# EAGLE board Shield STM32F407VET6 Mini - Backup (EAGLE 9.3.1)
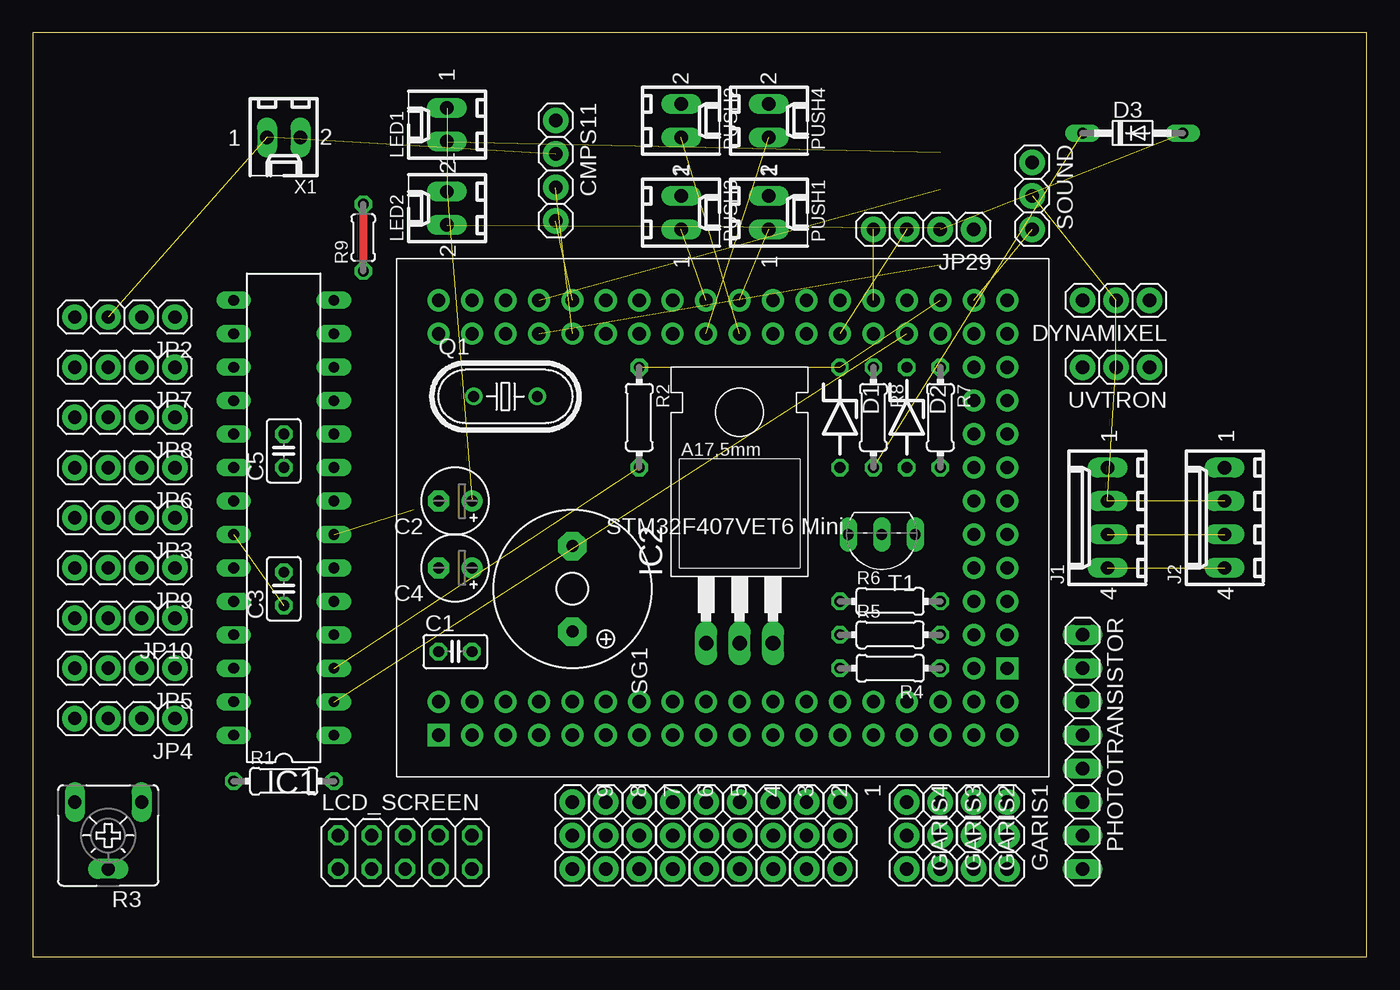
[diagram p0: board, top side]
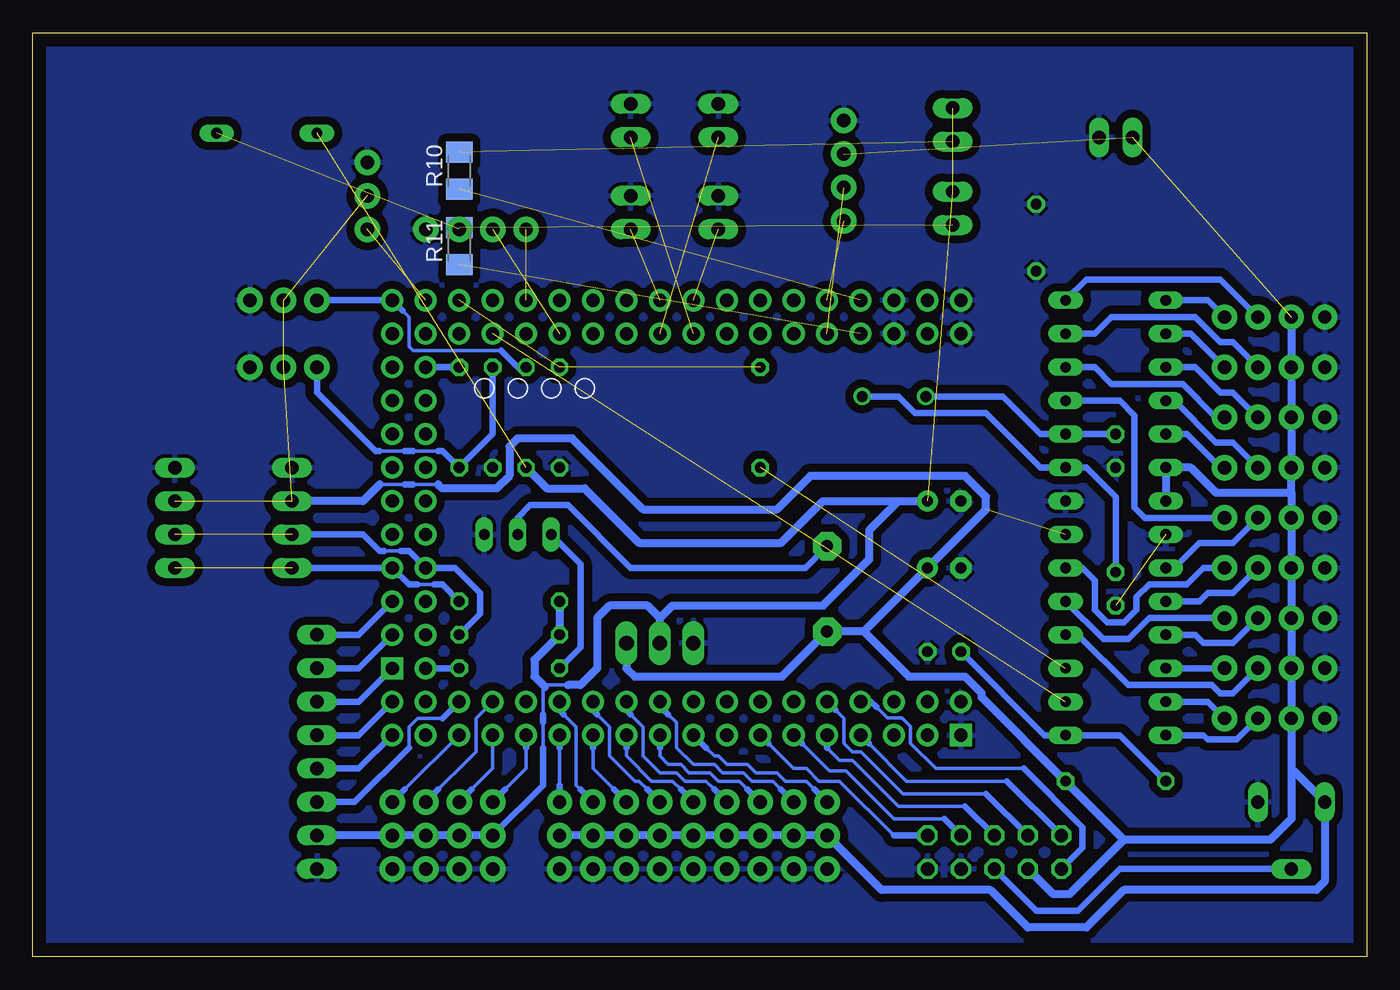
[diagram p1: board, bottom side, seen from below]

Size 101.26 x 70.16 mm. Coordinates in mm from the lower left corner, seen from the top.
Outline: 0,0 101.26,0 101.26,70.16 0,70.16 0,0
Copper layers (1*16): Top 0.035mm / dielectric 1.5mm / Bottom 0.035mm
Design rules "default *": minimum track width 6mil, minimum drill 0.35mm, track to track 6mil, track to pad 6mil, pad to pad 6mil, via to via 6mil, smd to smd 6mil, copper to edge 40mil, drill to drill 6mil, minimum pad ring 10mil, minimum via ring 8mil, stop-mask expansion 4mil, vias tented up to drill 0mil, thermal gap 10mil

## Footprints (pad centres in the part's own frame; a part is rotated, then mirrored left to right if it is on the bottom)
1X03 = drill 1.016 pad 1.93: 1 -2.54,0; 2 0,0; 3 2.54,0
C025-025X050 = drill 0.813 octagon: 1 -1.27,0; 2 1.27,0
E2,5-5 = drill 0.813 pad 1.6: + -1.27,0 | drill 0.813 pad 1.6 octagon: - 1.27,0
1X04 = drill 1.016 pad 1.93: 1 -3.81,0; 2 -1.27,0; 3 1.27,0; 4 3.81,0
ZDIO-7.5 = drill 0.813 octagon: A 3.81,0; C -3.81,0
DO34-7 = drill 0.813 long: A 3.81,0; C -3.81,0
DIL28-3 = drill 0.813 long: 1 -16.51,-3.81; 2 -13.97,-3.81; 3 -11.43,-3.81; 4 -8.89,-3.81; 5 -6.35,-3.81; 6 -3.81,-3.81; 7 -1.27,-3.81; 8 1.27,-3.81; 9 3.81,-3.81; 10 6.35,-3.81; 11 8.89,-3.81; 12 11.43,-3.81; 13 13.97,-3.81; 14 16.51,-3.81; 15 16.51,3.81; 16 13.97,3.81; 17 11.43,3.81; 18 8.89,3.81; 19 6.35,3.81; 20 3.81,3.81; 21 1.27,3.81; 22 -1.27,3.81; 23 -3.81,3.81; 24 -6.35,3.81; 25 -8.89,3.81; 26 -11.43,3.81; 27 -13.97,3.81; 28 -16.51,3.81
TO220 = drill 1.118 long: 1 -2.54,-6.35; 2 0,-6.35; 3 2.54,-6.35
6410-04 = drill 1.016 long: 1 3.81,0; 2 1.27,0; 3 -1.27,0; 4 -3.81,0
2X05 = drill 1.016 octagon: 1 -5.08,-1.27; 2 -5.08,1.27; 3 -2.54,-1.27; 4 -2.54,1.27; 5 0,-1.27; 6 0,1.27; 7 2.54,-1.27; 8 2.54,1.27; 9 5.08,-1.27; 10 5.08,1.27
6410-02 = drill 1.016 long: 1 1.27,0; 2 -1.27,0
1X08 = drill 1.016 long: 1 -8.89,0; 2 -6.35,0; 3 -3.81,0; 4 -1.27,0; 5 1.27,0; 6 3.81,0; 7 6.35,0; 8 8.89,0
HC49U70 = drill 0.813: 1 -2.413,0; 2 2.413,0
0204/7 = drill 0.813 octagon: 1 -3.81,0; 2 3.81,0
CA6V = drill 1.016 long: A -2.54,-2.54; E 2.54,-2.54; S 0,2.54
0204/5 = drill 0.813 octagon: 1 -2.54,0; 2 2.54,0
M1206 = smd 1.6 x 2: 1 -1.4,0; 2 1.4,0
F/QMBIII = drill 0.914 pad 2.159 octagon: + 3.251,0; - -3.251,0
TO92-ECB = drill 0.813 long: B 2.54,0; C 0,0; E -2.54,0
STM32F407VET6_MINI = drill 1 pad 1.676: 5VIN -16.51,-16.51; 5VIN@1 -16.51,-13.97; GND@1 -21.59,-13.97; GND@2 -16.51,16.51; GND@3 -16.51,13.97; GND@4 -21.59,16.51; GND@5 -21.59,13.97; PA0 3.81,-16.51; PA1 6.35,-16.51; PA2 3.81,-13.97; PA3 6.35,-13.97; PA4 8.89,-16.51; PA5 8.89,-13.97; PA6 11.43,-16.51; PA7 11.43,-13.97; PA8 16.51,13.97; PA9 16.51,16.51; PA10 13.97,13.97; PA11 13.97,16.51; PA12 11.43,13.97; PA13 11.43,16.51; PA14 8.89,13.97; PA15 8.89,16.51; PB0 16.51,-16.51; PB1 16.51,-13.97; PB2 19.05,-16.51; PB3 -6.35,13.97; PB4 -8.89,16.51; PB5 -8.89,13.97; PB6 -11.43,16.51; PB7 -11.43,13.97; PB8 -13.97,16.51; PB9 -13.97,13.97; PB10 19.05,-3.81; PB11 21.59,-3.81; PB12 19.05,-1.27; PB13 21.59,-1.27; PB14 19.05,1.27; PB15 21.59,1.27; PC0 -1.27,-16.51; PC1 -1.27,-13.97; PC2 1.27,-16.51; PC3 1.27,-13.97; PC4 13.97,-16.51; PC5 13.97,-13.97; PC6 21.59,13.97; PC7 19.05,13.97; PC8 21.59,16.51; PC9 19.05,16.51; PC10 6.35,13.97; PC11 6.35,16.51; PC12 3.81,16.51; PC13 -6.35,-13.97; PC14 -3.81,-16.51; PC15 -3.81,-13.97; PD0 3.81,13.97; PD1 1.27,16.51; PD2 1.27,13.97; PD3 -1.27,16.51; PD4 -1.27,13.97; PD5 -3.81,16.51; PD6 -3.81,13.97; PD7 -6.35,16.51; PD8 19.05,3.81; PD9 21.59,3.81; PD10 19.05,6.35; PD11 21.59,6.35; PD12 19.05,8.89; PD13 21.59,8.89; PD14 19.05,11.43; PD15 21.59,11.43; PE0 -13.97,-16.51; PE1 -13.97,-13.97; PE2 -11.43,-16.51; PE3 -11.43,-13.97; PE4 -8.89,-16.51; PE5 -8.89,-13.97; PE6 -6.35,-16.51; PE7 19.05,-13.97; PE8 21.59,-16.51; PE9 21.59,-13.97; PE10 19.05,-11.43; PE12 19.05,-8.89; PE13 21.59,-8.89; PE14 19.05,-6.35; PE15 21.59,-6.35; VBAT -19.05,-16.51; VCC3V3 -19.05,-13.97; VCC3V3@1 -19.05,16.51; VCC3V3@2 -19.05,13.97 | drill 1 pad 1.676 square: GND -21.59,-16.51; PE11 21.59,-11.43

## Placement (x,y rotation side)
1  [1X03]  61.28,9.21 270 top
2  [1X03]  58.74,9.21 270 top
3  [1X03]  56.2,9.21 270 top
4  [1X03]  53.66,9.21 270 top
5  [1X03]  51.12,9.21 270 top
6  [1X03]  48.58,9.21 270 top
7  [1X03]  46.04,9.21 270 top
8  [1X03]  43.5,9.21 270 top
9  [1X03]  40.96,9.21 270 top
C1  1uF  [C025-025X050]  32.07,23.18 0 top
C2  10uF Tantalum  [E2,5-5]  32.07,34.61 180 top
C3  22 pF  [C025-025X050]  19.05,27.94 90 top
C4  10uF Tantalum  [E2,5-5]  32.07,29.53 180 top
C5  22 pF  [C025-025X050]  19.05,38.42 90 top
CMPS11  [1X04]  39.69,59.69 270 top
D1  1N4728  [ZDIO-7.5]  61.28,40.96 270 top
D2  1N4728  [ZDIO-7.5]  66.36,40.96 270 top
D3  [DO34-7]  83.5,62.55 0 top
DYNAMIXEL  [1X03]  82.23,49.85 180 top
GARIS1  [1X03]  73.98,9.21 270 top
GARIS2  [1X03]  71.44,9.21 270 top
GARIS3  [1X03]  68.9,9.21 270 top
GARIS4  [1X03]  66.36,9.21 270 top
IC1  MEGA8-P  [DIL28-3]  19.05,33.34 90 top
IC2  LM1117T-3.3  [TO220]  53.66,30.16 0 top
J1  22-27-2041-04  [6410-04]  81.6,33.34 90 top
J2  22-27-2041-04  [6410-04]  90.49,33.34 90 top
JP2  [1X04]  6.99,48.58 180 top
JP3  [1X04]  6.99,33.34 180 top
JP4  [1X04]  6.99,18.1 180 top
JP5  [1X04]  6.99,21.91 180 top
JP6  [1X04]  6.99,37.15 180 top
JP7  [1X04]  6.99,44.77 180 top
JP8  [1X04]  6.99,40.96 180 top
JP9  [1X04]  6.99,29.53 180 top
JP10  [1X04]  6.99,25.72 180 top
JP29  [1X04]  67.63,55.24 180 top
LCD_SCREEN  [2X05]  28.26,7.94 0 top
LED1  22-27-2021-02  [6410-02]  31.43,63.18 90 top
LED2  22-27-2021-02  [6410-02]  31.43,56.83 90 top
PHOTOTRANSISTOR  [1X08]  79.69,15.56 270 top
PUSH1  22-27-2021-02  [6410-02]  55.88,56.52 270 top
PUSH2  22-27-2021-02  [6410-02]  49.21,63.5 270 top
PUSH3  22-27-2021-02  [6410-02]  49.21,56.52 270 top
PUSH4  22-27-2021-02  [6410-02]  55.88,63.5 270 top
Q1  16 Mhz  [HC49U70]  35.88,42.55 0 top
R1  10k  [0204/7]  19.05,13.34 0 top
R2  470  [0204/7]  46.04,40.96 270 top
R3  10k  [CA6V]  5.71,9.21 180 top
R4  1k  [0204/7]  65.09,21.91 180 top
R5  4k7  [0204/7]  65.09,24.45 0 top
R6  4k7  [0204/7]  65.09,26.99 0 top
R7  470  [0204/7]  68.9,40.96 270 top
R8  10k  [0204/7]  63.82,40.96 270 top
R9  [0204/5]  25.08,54.61 90 top
R10  330  [M1206]  68.9,59.69 90 bottom
R11  330  [M1206]  68.9,53.98 90 bottom
SG1  F/QMBIII  [F/QMBIII]  40.96,27.94 270 top
SOUND  [1X03]  75.88,57.78 270 top
T1  2SC945  [TO92-ECB]  64.45,32.07 180 top
U$2  STM32F407VET6_MINI  [STM32F407VET6_MINI]  52.39,33.34 0 top
UVTRON  [1X03]  82.23,44.77 180 top
X1  22-27-2021-02  [6410-02]  19.05,62.23 180 top

## Library data of the parts
1-9 CMPS11 DYNAMIXEL GARIS1-GARIS4 JP2-JP10 JP29 LCD_SCREEN PHOTOTRANSISTOR SOUND UVTRON = pinhead
C1-C5 R1 R2 R4-R11 = rcl
D1-D3 = diode
IC1 = atmel; OC_FARNELL: unknown; OC_NEWARK: unknown
IC2 = lm1117
J1 J2 LED1 LED2 PUSH1-PUSH4 X1 = con-molex; OC_FARNELL: unknown; OC_NEWARK: unknown
Q1 = crystal; OC_FARNELL: unknown; OC_NEWARK: unknown
R3 = pot
SG1 = buzzer; OC_FARNELL: unknown; OC_NEWARK: unknown
T1 = transistor
U$2 = STM32F407VET6-Mini

## Nets
1: 1.1 U$2.PA4
2: 2.1 U$2.PA5
3: 3.1 U$2.PA1
3.3: C2.+ D3.C GARIS1.2 GARIS2.2 GARIS3.2 GARIS4.2 IC2.2 LED1.1 LED2.1 PHOTOTRANSISTOR.7 R5.1 R6.1 R8.2
4: 4.1 U$2.PA3
5: 5.1 U$2.PA0
6: 6.1 U$2.PA2
7: 7.1 U$2.PC2
8: 8.1 U$2.PC3
9: 9.1 U$2.PC0
A: PHOTOTRANSISTOR.5 U$2.PE8
B: PHOTOTRANSISTOR.4 U$2.PE9
BZ: R4.1 U$2.PE10
C: PHOTOTRANSISTOR.3 U$2.PE11
D: PHOTOTRANSISTOR.2 U$2.PE13
D4: LCD_SCREEN.4 U$2.PE3
D5: LCD_SCREEN.6 U$2.PE2
D6: LCD_SCREEN.8 U$2.PE4
D7: LCD_SCREEN.10 U$2.PE6
DNX: DYNAMIXEL.3 R8.1 U$2.PC8
E: LCD_SCREEN.2 U$2.PE0
E1: IC1.11 JP3.1
E2: IC1.15 JP2.1
E3: IC1.26 JP5.1
E4: IC1.27 JP4.1
E5: IC1.16 JP7.1
E6: IC1.19 JP6.1
E7: IC1.6 JP9.1
E8: IC1.12 JP8.1
E9: IC1.5 JP10.1
EM: PHOTOTRANSISTOR.1 U$2.PE15
GARIS1: GARIS1.1 U$2.PB0
GARIS2: GARIS2.1 U$2.PC5
GARIS3: GARIS3.1 U$2.PC4
GARIS4: GARIS4.1 U$2.PA6
GND: 1.3 2.3 3.3 4.3 5.3 6.3 7.3 8.3 9.3 C1.2 C2.- C3.1 C4.- C5.1 CMPS11.1 D1.A D2.A DYNAMIXEL.1 GARIS1.3 GARIS2.3 GARIS3.3 GARIS4.3 IC1.8 IC1.22 IC2.1 J1.1 J2.1 JP2.4 JP3.4 JP4.4 JP5.4 JP6.4 JP7.4 JP8.4 JP9.4 JP10.4 JP29.1 LCD_SCREEN.7 LCD_SCREEN.9 PHOTOTRANSISTOR.8 PUSH1.2 PUSH2.2 PUSH3.2 PUSH4.2 R3.A R9.1 R9.2 SOUND.1 T1.E U$2.GND U$2.GND@1 U$2.GND@2 U$2.GND@3 U$2.GND@4 U$2.GND@5 UVTRON.1 X1.2
LED1: R10.1 U$2.PB8
LED2: R11.1 U$2.PB9
N$1: C1.1 IC1.1 R1.1
N$2: D3.A JP29.2
N$3: C5.2 IC1.10 Q1.1
N$4: C3.2 IC1.9 Q1.2
N$5: LED1.2 R10.2
N$6: D2.C R7.2 UVTRON.3
N$7: LCD_SCREEN.5 R3.S
N$8: LED2.2 R11.2
N$10: U$2.PE7
N$16: SG1.- T1.C
N$17: R4.2 T1.B
N$23: IC1.3 R2.2
OUTPUT: PHOTOTRANSISTOR.6 U$2.PB1
PUSH1: PUSH1.1 U$2.PD1
PUSH2: PUSH2.1 U$2.PD2
PUSH3: PUSH3.1 U$2.PD3
PUSH4: PUSH4.1 U$2.PD4
RS: LCD_SCREEN.1 U$2.PE1
RX: IC1.2 U$2.PA10
SCL: J1.3 J2.3 R5.2 U$2.PB10
SCL_CMPS11: CMPS11.4 U$2.PB6
SDA: J1.4 J2.4 R6.2 U$2.PB11
SDA_CMPS11: CMPS11.3 U$2.PB7
SOUND: SOUND.3 U$2.PC9
SWCLK: JP29.3 U$2.PA14
SWDIO: JP29.4 U$2.PA13
T1: IC1.23 JP3.2
T2: IC1.14 JP2.2
T3: IC1.4 JP5.2
T4: IC1.28 JP4.2
T5: IC1.13 JP7.2
T6: IC1.18 JP6.2
T7: IC1.24 JP9.2
T8: IC1.17 JP8.2
T9: IC1.25 JP10.2
TX: D1.C R2.1 U$2.PA9
UV: R7.1 U$2.PD14
VCC: 1.2 2.2 3.2 4.2 5.2 6.2 7.2 8.2 9.2 C4.+ CMPS11.2 DYNAMIXEL.2 IC1.7 IC1.20 IC1.21 IC2.3 J1.2 J2.2 JP2.3 JP3.3 JP4.3 JP5.3 JP6.3 JP7.3 JP8.3 JP9.3 JP10.3 LCD_SCREEN.3 R1.2 R3.E SG1.+ SOUND.2 UVTRON.2 X1.1

## Tracks (layer width: path | path; a pad name or v marks a point on that pad's centre or on a via)
1
  Bottom 0.254: 61.28,13.02 61.28,15.88
  Bottom 0.508: U$2.PA4 61.28,15.88 | 1.1 61.28,13.02
2
  Bottom 0.254: 59.69,12.7 60.01,13.02 60.01,17.46 60.96,18.41
  Bottom 0.508: U$2.PA5 61.28,18.73 60.96,18.41 | 2.1 59.69,12.7
3
  Bottom 0.254: 58.74,15.88 58.74,14.29 57.15,12.7
  Bottom 0.508: U$2.PA1 58.74,15.88 | 3.1 57.15,12.7
3.3  (3 unrouted)
  Bottom 0.254: 60.64,20.64 62.23,20.64 62.39,20.48 62.55,20.32 62.55,18.41 | 62.55,15.88 62.55,17.78
  Bottom 0.508: GARIS4.2 62.55,13.02 62.55,15.88 | 62.55,17.78 62.55,18.41
  Bottom 0.61: GARIS4.2 GARIS3.2 GARIS2.2 GARIS1.2 PHOTOTRANSISTOR.7 | R6.1 R5.1 63.18,22.54 63.18,21.27 62.39,20.48 | IC2.2 53.66,25.72 | 53.66,25.72 52.7,26.67 41.27,26.67 37.78,30.16 37.78,32.38 36.35,33.81 | R8.2 62.23,35.56 59.37,35.56 55.24,31.43 44.45,31.43 41.27,34.61 35.56,34.61 | 53.66,25.72 54.61,26.67 57.47,26.67 58.42,25.72 58.42,21.91 59.69,20.64 60.64,20.64 | 35.56,34.61 C2.+ | 35.56,34.61 36.35,33.81 | 36.35,33.81
4
  Bottom 0.254: 58.42,18.41 57.47,17.46 57.47,15.24 55.56,13.34 55.24,13.34 54.61,12.7
  Bottom 0.508: U$2.PA3 58.74,18.73 58.42,18.41 | 4.1 54.61,12.7
5
  Bottom 0.254: 56.2,15.88 56.2,15.24 54.29,13.34 52.7,13.34 52.07,12.7
  Bottom 0.508: U$2.PA0 56.2,15.88 | 5.1 52.07,12.7
6
  Bottom 0.254: 55.88,18.41 54.93,17.46 54.93,15.24 53.66,13.97 52.39,13.97 51.75,13.34 50.16,13.34 49.53,12.7
  Bottom 0.508: U$2.PA2 56.2,18.73 55.88,18.41 | 6.1 49.53,12.7
7
  Bottom 0.254: 53.66,15.88 53.66,15.24 53.02,14.61 52.07,14.61 51.44,13.97 49.85,13.97 49.21,13.34 47.62,13.34 46.99,12.7
  Bottom 0.508: U$2.PC2 53.66,15.88 | 7.1 46.99,12.7
8
  Bottom 0.254: 53.02,18.41 52.39,17.78 52.39,15.88 51.12,14.61 49.53,14.61 48.9,13.97 47.31,13.97 46.67,13.34 45.09,13.34 44.45,12.7
  Bottom 0.508: U$2.PC3 53.66,19.05 53.02,18.41 | 8.1 44.45,12.7
9
  Bottom 0.254: 41.91,12.7 42.55,13.34 44.13,13.34 44.77,13.97 46.35,13.97 46.99,14.61 48.58,14.61 49.21,15.24 49.53,15.24 50.16,15.88
  Bottom 0.508: U$2.PC0 50.16,15.88 | 9.1 41.91,12.7
A
  Bottom 0.508: U$2.PE8 76.52,14.29 PHOTOTRANSISTOR.5
B
  Bottom 0.508: U$2.PE9 76.52,16.83 PHOTOTRANSISTOR.4
BZ
  Bottom 0.508: R4.1 U$2.PE10
C
  Bottom 0.508: U$2.PE11 76.52,19.37 PHOTOTRANSISTOR.3
D
  Bottom 0.508: U$2.PE13 76.52,21.91 PHOTOTRANSISTOR.2
D4
  Bottom 0.254: 28.89,12.38 35.22,12.38 38.39,15.56 39.05,15.56 39.69,16.19 39.69,18.1 40.32,18.73
  Bottom 0.508: U$2.PE3 40.32,18.73 | 28.89,12.38 LCD_SCREEN.4
D5
  Bottom 0.254: 40.96,15.88 40.01,14.92 39.05,14.92 35.56,11.43 30.48,11.43
  Bottom 0.508: 30.48,11.43 LCD_SCREEN.6 | U$2.PE2 40.96,15.88
D6
  Bottom 0.254: 42.86,16.19 40.8,14.13 39.53,14.13 35.88,10.48 32.07,10.48
  Bottom 0.508: 32.07,10.48 LCD_SCREEN.8 | 42.86,16.19 U$2.PE4
D7
  Bottom 0.254: 45.4,16.19 43.5,14.29 42.55,14.29 41.59,13.34 40.01,13.34 35.88,9.21
  Bottom 0.508: U$2.PE6 45.4,16.19 | 35.88,9.21 LCD_SCREEN.10
DNX
  Bottom 0.254: 65.72,46.04 72.39,46.04 72.71,46.35 72.71,48.58 73.18,49.05
  Bottom 0.508: DYNAMIXEL.3 U$2.PC8 73.18,49.05 | R8.1 64.45,44.77 65.72,46.04
E
  Bottom 0.254: 27.3,13.34 34.92,13.34 37.78,16.19
  Bottom 0.508: LCD_SCREEN.2 27.3,13.34 | 37.78,16.19 U$2.PE0
E1
  Bottom 0.508: IC1.11 18.73,42.23 17.62,41.12 17.62,34.13 16.83,33.34 JP3.1 11.43,33.34
E2
  Bottom 0.508: JP2.1 12.06,49.85 IC1.15
E3
  Bottom 0.508: JP5.1 IC1.26
E4
  Bottom 0.508: JP4.1 12.06,19.37 IC1.27
E5
  Bottom 0.508: JP7.1 13.34,47.31 IC1.16
E6
  Bottom 0.508: JP6.1 11.11,37.15 13.65,39.69 IC1.19
E7
  Bottom 0.508: JP9.1 12.38,29.53 13.65,28.26 16.51,28.26 17.46,27.3 17.46,26.35 18.41,25.4 19.68,25.4 20.64,26.35 20.64,28.57 21.59,29.53 IC1.6
E8
  Bottom 0.508: IC1.12 20.64,44.77 19.37,43.5 13.97,43.5 11.43,40.96 JP8.1
E9
  Bottom 0.508: JP10.1 16.51,25.72 18.1,24.13 20,24.13 IC1.5
EM
  Bottom 0.508: U$2.PE15 76.52,24.45 PHOTOTRANSISTOR.1
GARIS1
  Bottom 0.254: 73.03,12.7 U$2.PB0
  Bottom 0.508: GARIS1.1 73.03,12.7
GARIS2
  Bottom 0.254: U$2.PC5 67.63,18.1 67.63,15.56 68.26,14.92 70.48,12.7
  Bottom 0.508: GARIS2.1 70.48,12.7
GARIS3
  Bottom 0.254: U$2.PC4 66.36,14.29 67.94,12.7
  Bottom 0.508: 67.94,12.7 GARIS3.1
GARIS4
  Bottom 0.254: 63.82,15.88 63.82,14.29 65.41,12.7
  Bottom 0.508: U$2.PA6 63.82,15.88 | GARIS4.1 65.41,12.7
GND  (1 unrouted)
  Top 0.61: R9.2 R9.1
  pour Bottom (isolate 0.61): 0,70.17 101.28,70.17 101.28,0 0,0
LED1  (1 unrouted)
LED2  (1 unrouted)
N$1
  Bottom 0.508: C1.1 24.45,16.83 IC1.1 18.73,16.83 R1.1
N$2  (1 unrouted)
N$3
  Bottom 0.508: C5.2 IC1.10 24.77,39.69 27.62,42.55 Q1.1
N$4
  Bottom 0.508: Q1.2 35.56,42.55 34.29,41.27 28.89,41.27 24.77,37.15 IC1.9 21.27,37.15 19.05,34.92 C3.2
N$5  (1 unrouted)
N$6
  Bottom 0.254: 70.48,38.42 72.39,38.42 | 73.03,38.42 74.93,38.42
  Bottom 0.508: D2.C 66.36,39.69 R7.2 70.17,38.42 70.48,38.42 | 72.39,38.42 73.03,38.42 | 74.93,38.42 75.25,38.42 79.69,42.86 UVTRON.3
N$7
  Bottom 0.508: R3.S 18.73,6.67 21.91,3.49 25.08,3.49 LCD_SCREEN.5
N$8  (1 unrouted)
N$16
  Bottom 0.508: T1.C 64.45,33.34 63.5,34.29 60.64,34.29 55.88,29.53 42.62,29.53 SG1.-
N$17
  Bottom 0.508: T1.B 59.69,29.84 59.69,23.5 R4.2
N$23  (1 unrouted)
OUTPUT
  Bottom 0.254: 70.17,18.1 72.07,18.1 72.71,17.46 72.71,15.88
  Bottom 0.508: U$2.PB1 70.17,18.1 | PHOTOTRANSISTOR.6 76.83,11.75 72.71,15.88
PUSH1  (1 unrouted)
PUSH2  (1 unrouted)
PUSH3  (1 unrouted)
PUSH4  (1 unrouted)
RS
  Bottom 0.254: 26.04,14.29 32.7,14.29 34.63,16.22 34.63,17.49 35.27,18.12 36.39,18.12 37.23,18.96
  Bottom 0.508: U$2.PE1 37.64,19.37 37.23,18.96 | LCD_SCREEN.1 21.59,8.26 21.59,9.84 26.04,14.29
RX  (1 unrouted)
SCL  (1 unrouted)
  Bottom 0.254: 73.34,30.8 74.61,30.8
  Bottom 0.508: J1.3 76.2,32.07 74.93,30.8 74.61,30.8 | 73.34,30.8 72.71,30.8 U$2.PB10 69.22,29.53 67.31,27.62 67.31,26.04 R5.2
SCL_CMPS11  (1 unrouted)
SDA  (1 unrouted)
  Bottom 0.254: 70.8,28.26 72.07,28.26
  Bottom 0.508: J1.4 U$2.PB11 72.71,28.26 72.07,28.26 | R6.2 70.17,28.26 70.8,28.26
SDA_CMPS11  (1 unrouted)
SOUND  (1 unrouted)
SWCLK  (1 unrouted)
SWDIO  (1 unrouted)
T1
  Bottom 0.508: JP3.2 10.16,31.43 12.7,31.43 14.61,29.53 IC1.23
T2
  Bottom 0.508: JP2.2 11.11,51.44 21.27,51.44 IC1.14
T3
  Bottom 0.508: JP5.2 10.16,20 11.11,20 11.75,20.64 18.1,20.64 21.91,24.45 IC1.4
T4
  Bottom 0.508: JP4.2 9.84,16.51 12.06,16.51 12.38,16.83 IC1.28
T5
  Bottom 0.508: JP7.2 10.16,46.67 11.11,46.67 13.02,48.58 19.37,48.58 20.64,47.31 IC1.13
T6
  Bottom 0.508: IC1.18 14.61,42.23 11.43,39.05 10.16,39.05 JP6.2
T7
  Bottom 0.508: IC1.24 12.7,26.99 12.06,27.62 10.16,27.62 JP9.2
T8
  Bottom 0.508: IC1.17 13.02,44.77 11.11,42.86 10.16,42.86 JP8.2
T9
  Bottom 0.508: JP10.2 10.16,23.81 12.38,23.81 13.02,24.45 IC1.25
TX  (2 unrouted)
UV
  Bottom 0.508: R7.1 U$2.PD14
VCC  (7 unrouted)
  Bottom 0.254: 72.39,35.88 70.48,35.88 | 73.03,35.88 74.93,35.88
  Bottom 0.508: 73.03,35.88 72.39,35.88
  Bottom 0.61: JP2.3 JP7.3 JP8.3 JP6.3 5.71,35.24 | 5.71,35.24 JP3.3 JP9.3 JP10.3 JP5.3 JP4.3 5.71,14.29 | 5.71,35.24 11.43,35.24 13.34,37.15 IC1.20 IC1.21 | 1.2 2.2 3.2 4.2 5.2 6.2 7.2 8.2 9.2 36.83,5.08 28.57,5.08 25.72,2.22 21.27,2.22 18.41,5.08 3.81,5.08 3.17,5.71 R3.E 5.71,14.29 | LCD_SCREEN.3 23.81,4.76 22.54,4.76 18.41,8.89 | 18.41,8.89 7.3,8.89 5.71,10.48 5.71,14.29 | 38.18,24.69 C4.+ 28.89,33.97 28.89,34.92 30.48,36.51 42.23,36.51 44.77,33.97 54.93,33.97 60.33,39.37 64.45,39.37 65.09,38.73 65.09,36.51 66.04,35.56 70.17,35.56 70.48,35.88 | 38.18,24.69 SG1.+ 44.37,21.27 55.56,21.27 56.2,21.91 IC2.3 | 18.41,8.89 R1.2 29.21,19.68 29.21,20 30.48,21.27 34.76,21.27 38.18,24.69 | 74.93,35.88 76.2,34.61 J1.2